# Altium PCB MainBoard.PcbDoc
Units mil, origin at the board's own origin, x right, y up, seen from the top; angles counter-clockwise.
Board outline 4000 x 4000 mil, 2 copper layers (Top Layer, Bottom Layer); 62 components, 26 nets, 130 pads, 17 vias.
Unrouted connection lines stored in the file: 4.
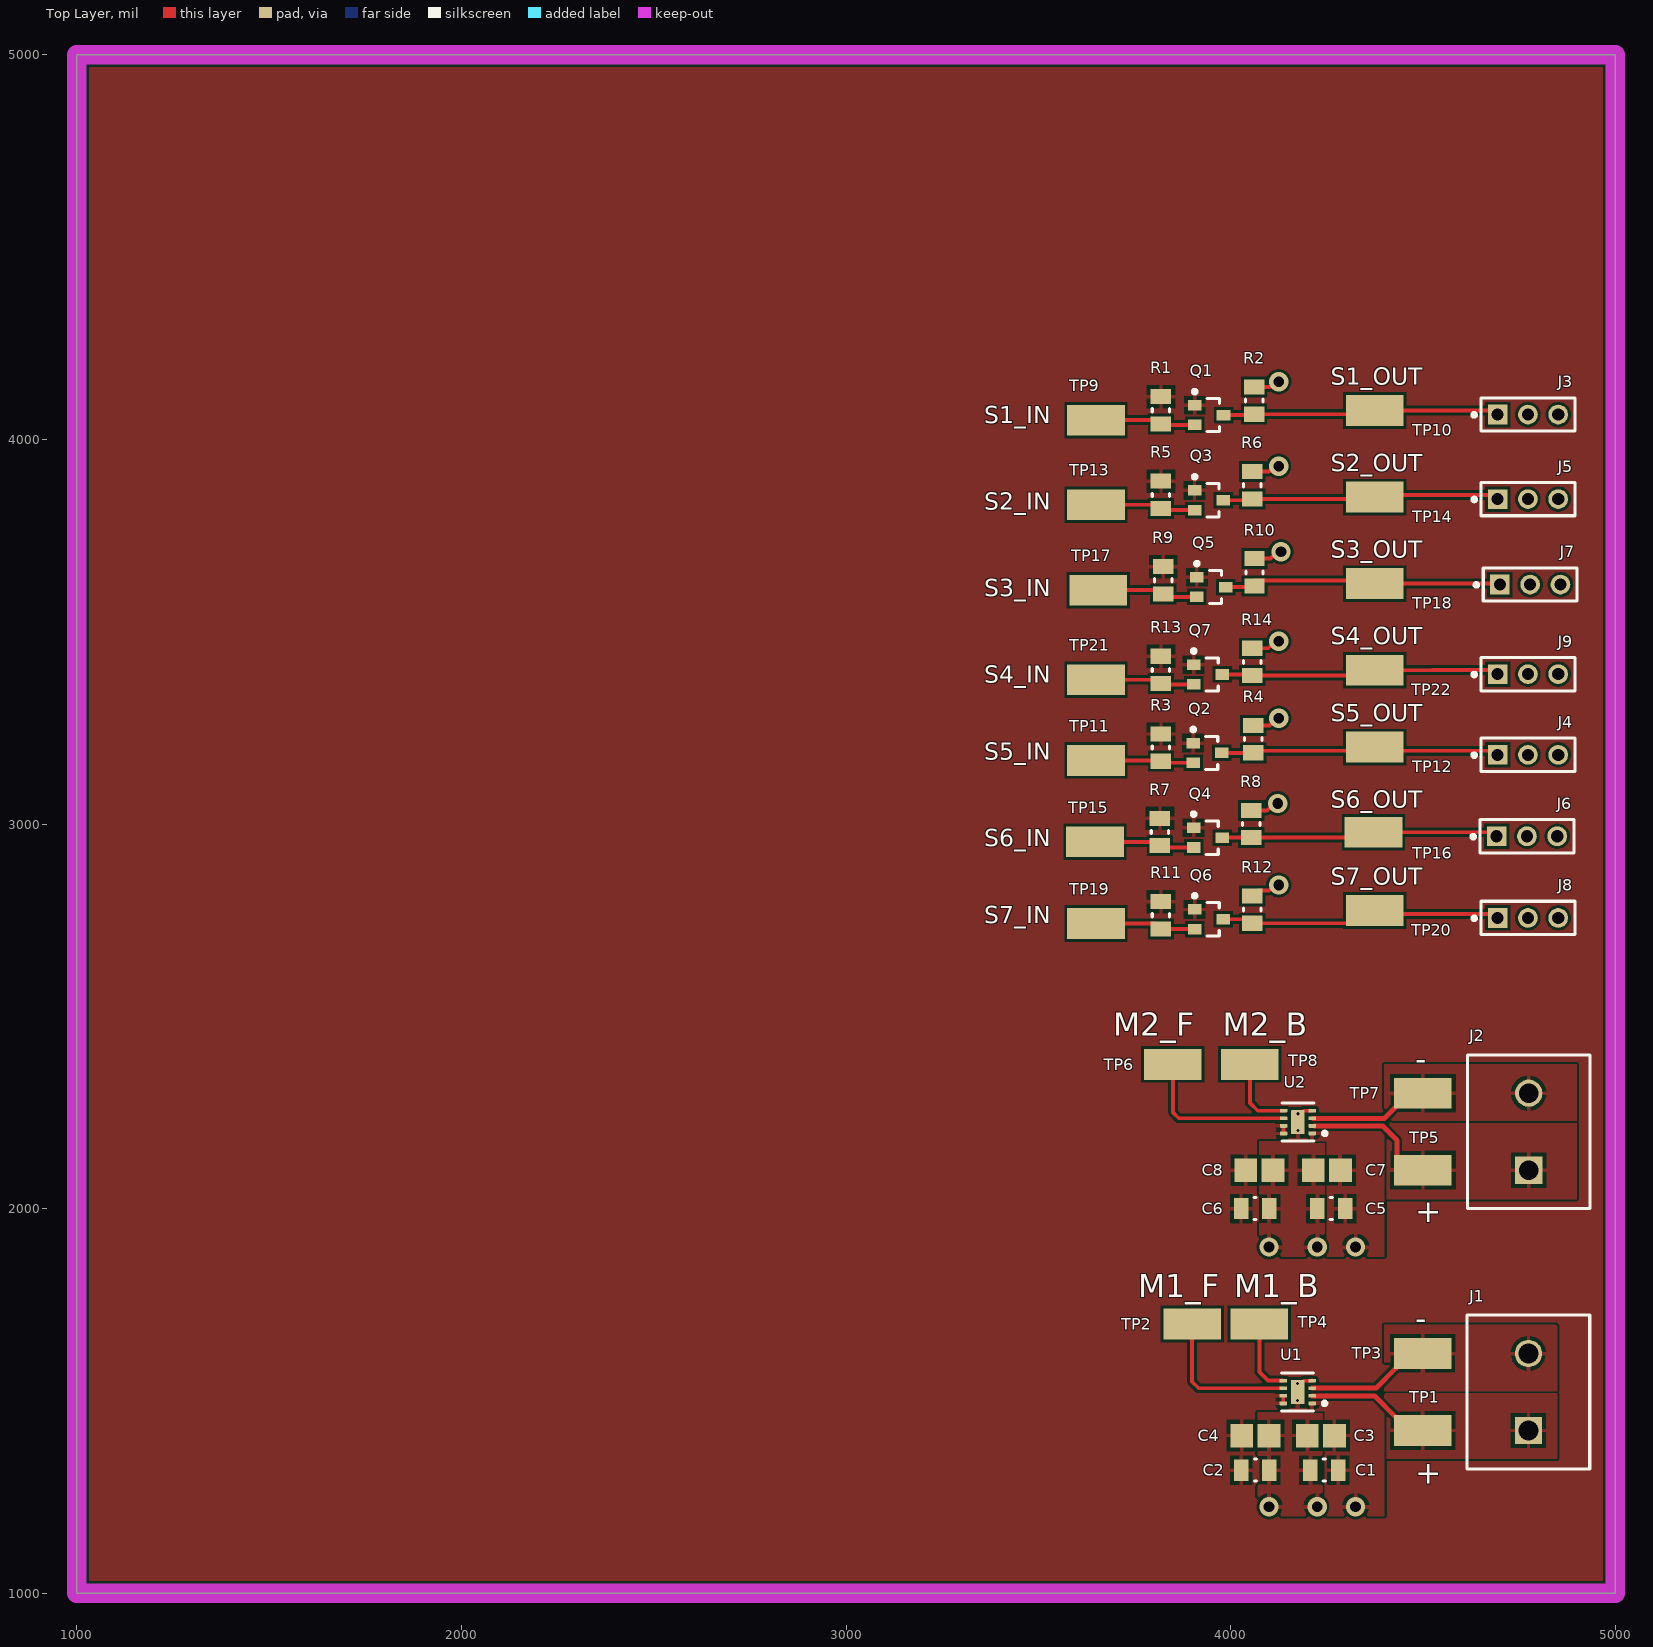
[diagram p0: Top Layer view]
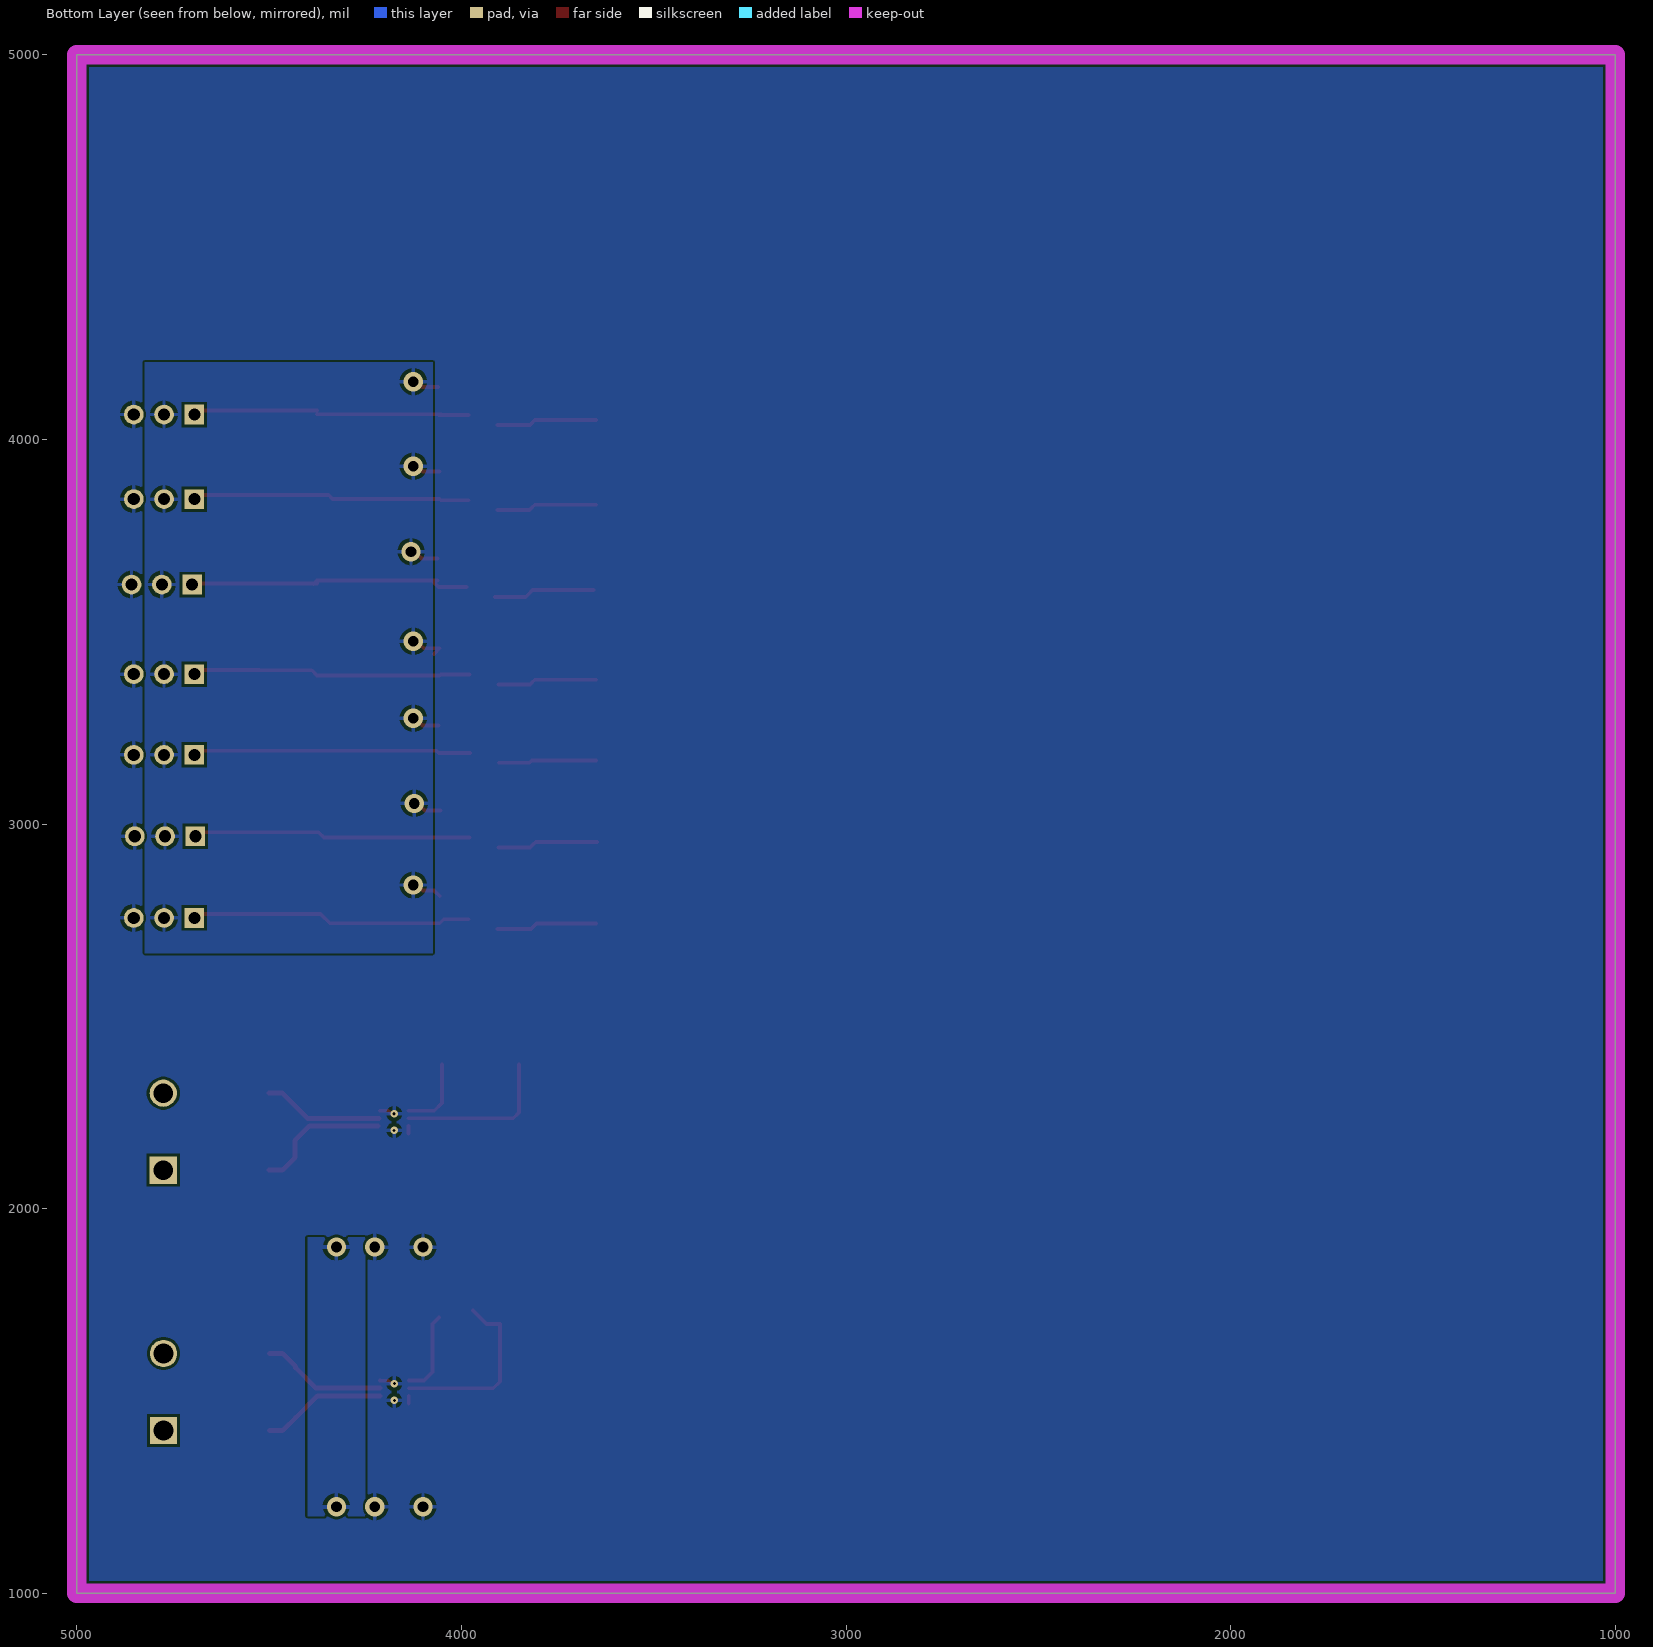
[diagram p1: Bottom Layer view, seen from below]
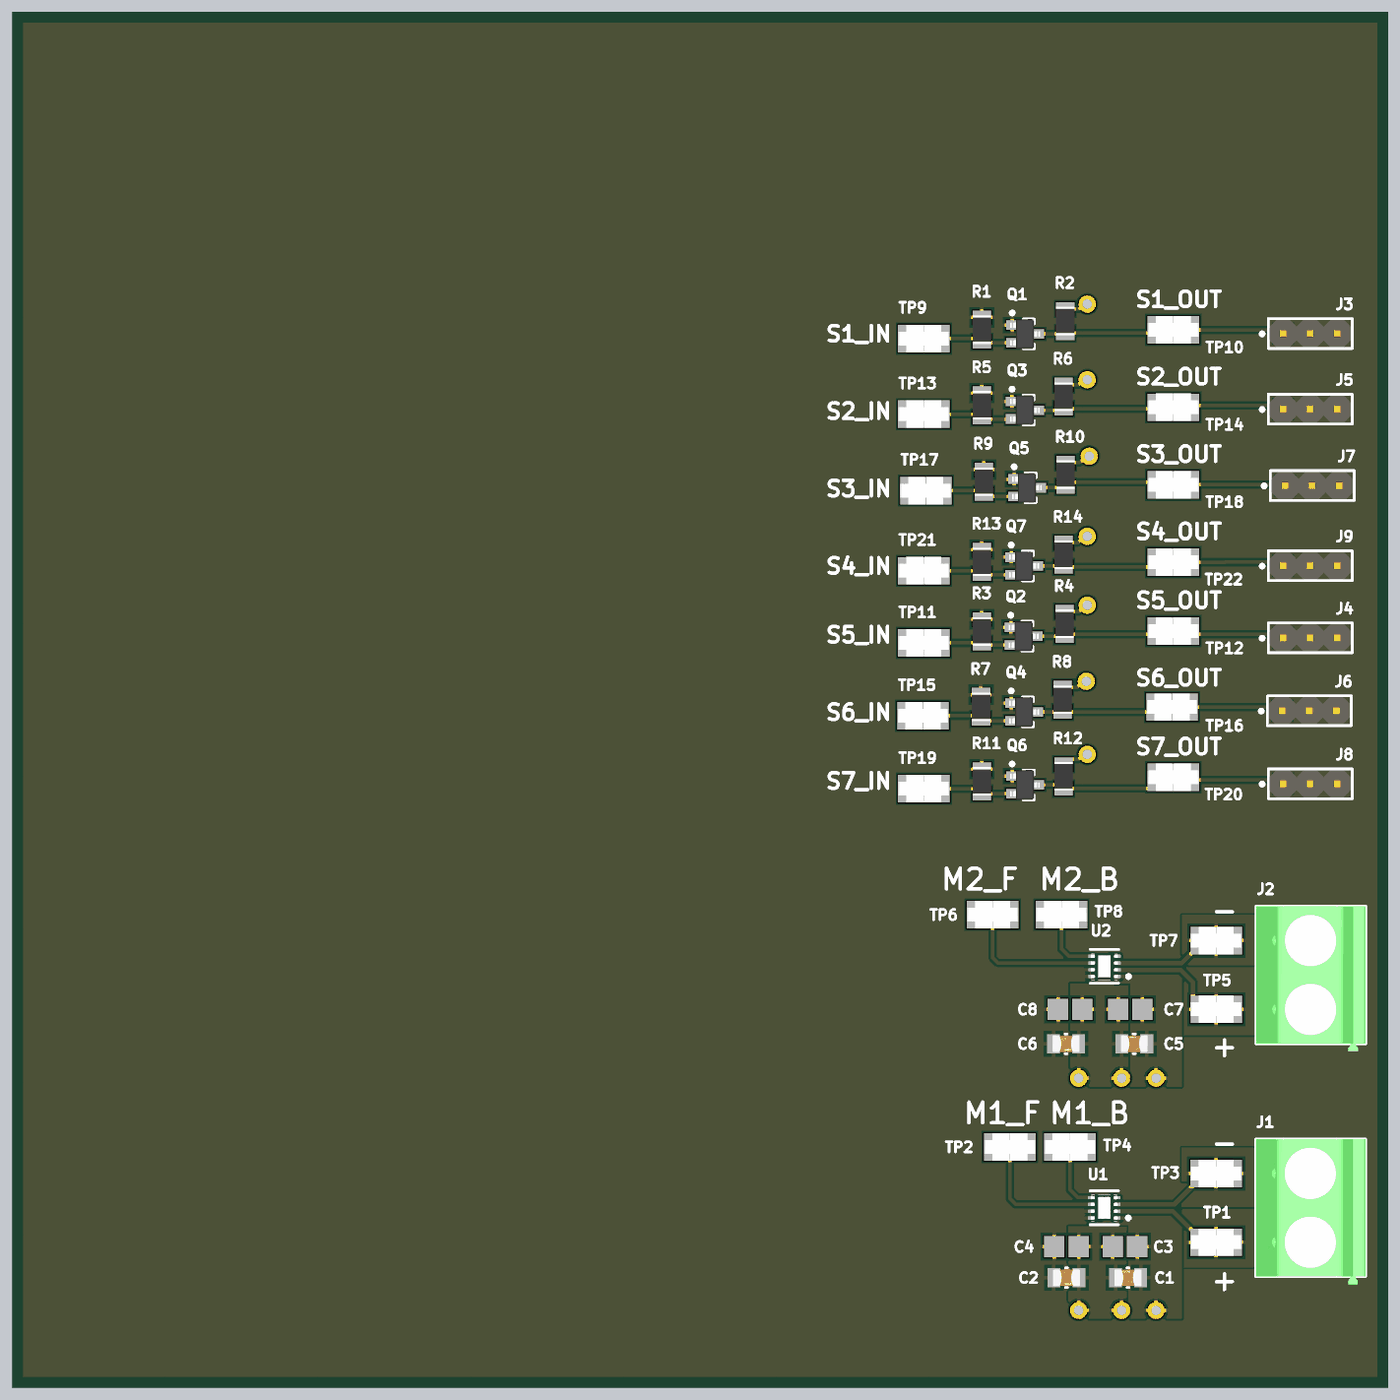
[diagram p2: 3D render of the assembled board from above, using the file's embedded part models]

## Layer stack, top to bottom
Top Solder: solder mask 0.4, Solder Resist, Dk 3.5
Top Layer: signal copper 1.4
Dielectric 1: dielectric 12.6, FR-4, Dk 4.8
Bottom Layer: signal copper 1.4
Bottom Solder: solder mask 0.4, Solder Resist, Dk 3.5

## Board outline
1000,1000 5000,1000 5000,5000 1000,5000

## Design rules (kind name [scope] priority, off if disabled: settings)
Clearance [All] p1: gap=7 ignorepadtopadclearanceinfootprint=TRUE except(5: Arc-Arc Arc-Track Track-Track Fill-Fill Fill-Poly Fill-Region Poly-Poly Poly-Region Region-Region)
PolygonConnect [All] p1: connectstyle=Relief reliefconductorwidth=10 reliefentries=4 polygonreliefangle="90 Angle" airgapwidth=10
RoomDefinition ServoDrivers [InComponentClass('ServoDrivers')] p1: confinementstyle=ConfineIn formatcopy=TRUE lockcomponents=FALSE outline 3250,2639.57 4972.17,2639.57 4972.17,4264.57 3250,4264.57
RoomDefinition MotorDrivers [InComponentClass('MotorDrivers')] p2: confinementstyle=ConfineIn formatcopy=TRUE lockcomponents=FALSE outline 3599.31,998.17 4999.31,998.17 4999.31,2625 3599.31,2625
RoutingVias [All] p1: holewidth=28 width=50 viastyle="Through Hole" minholewidth=28 minwidth=50 maxholewidth=28 maxwidth=50
SolderMaskExpansion [All] p1: expansion=4 istentingtop=FALSE
Width [All] p1: maxlimit=30 minlimit=10 preferedwidth=10
30 further rules are at their usual default settings.

## Classes and differential pairs
component class ServoDrivers: J3 J4 J5 J6 J7 J8 J9 Q1 Q2 Q3 Q4 Q5 Q6 Q7 R1 R2 R3 R4 R5 R6 R7 R8 R9 R10 R11 R12 R13 R14 TP9 TP10 TP11 TP12 TP13 TP14 TP15 TP17 TP18 TP19 TP20 TP21 TP22
component class MotorDrivers: C1 C2 C3 C4 C5 C6 C7 C8 J1 J2 TP1 TP2 TP3 TP4 TP5 TP6 TP7 TP8 U1 U2

## Components (designator, comment, footprint, x,y, rotation, side; value= is the part's Value field where it differs from the comment)
C1 "0.1uF" FP-CC0805-0_85-MFG 4243.58,1320 r180 top value="100 nF"
C2 "0.1uF" FP-CC0805-0_85-MFG 4064.45,1320 r0 top value="100 nF"
C3 "1uF" CAPC2013X145X50ML20T25 4234.57,1410 r0 top
C4 "1uF" CAPC2013X145X50ML20T25 4064.57,1410 r180 top
C5 "0.1uF" FP-CC0805-0_85-MFG 4261.42,2000 r180 top value="100 nF"
C6 "0.1uF" FP-CC0805-0_85-MFG 4063.58,2000 r0 top value="100 nF"
C7 "1uF" CAPC2013X145X50ML20T25 4250,2100 r0 top
C8 "1uF" CAPC2013X145X50ML20T25 4075,2100 r180 top
J1 "1729128" PHOE-1729128-2_V 4774.31,1523.17 r90 top
J2 "1729128" PHOE-1729128-2_V 4775,2200 r90 top
J3 "951103-8622-AR" FP-951103-8622-AR-MFG 4773.03,4064.57 r0 top
J4 "951103-8622-AR" FP-951103-8622-AR-MFG 4773.03,3179.89 r0 top
J5 "951103-8622-AR" FP-951103-8622-AR-MFG 4773.03,3844.74 r0 top
J6 "951103-8622-AR" FP-951103-8622-AR-MFG 4770.41,2968.11 r0 top
J7 "951103-8622-AR" FP-951103-8622-AR-MFG 4778.86,3622.55 r0 top
J8 "951103-8622-AR" FP-951103-8622-AR-MFG 4773.03,2755.84 r0 top
J9 "951103-8622-AR" FP-951103-8622-AR-MFG 4773.03,3389.57 r0 top
Q1 "BSS138W-7-F" DIOD-SOT323-3_V 3944.16,4063.2 r0 top
Q2 "BSS138W-7-F" DIOD-SOT323-3_V 3939.95,3184.74 r0 top
Q3 "BSS138W-7-F" DIOD-SOT323-3_V 3943.7,3841.79 r0 top
Q4 "BSS138W-7-F" DIOD-SOT323-3_V 3941.27,2964.57 r0 top
Q5 "BSS138W-7-F" DIOD-SOT323-3_V 3949.73,3616.05 r0 top
Q6 "BSS138W-7-F" DIOD-SOT323-3_V 3943.9,2752.29 r0 top
Q7 "BSS138W-7-F" DIOD-SOT323-3_V 3941.27,3388.72 r0 top
R1 "10k" RESC2013X60X35NL10T20 3818.9,4075.79 r90 top value=10kR
R2 "10k" RESC2013X60X35NL10T20 4060.97,4100.9 r90 top value=10kR
R3 "10k" RESC2013X60X35NL10T20 3818.9,3198.64 r90 top value=10kR
R4 "10k" RESC2013X60X35NL10T20 4059.16,3220.54 r90 top value=10kR
R5 "10k" RESC2013X60X35NL10T20 3818.9,3855.96 r90 top value=10kR
R6 "10k" RESC2013X60X35NL10T20 4056.3,3880.77 r90 top value=10kR
R7 "10k" RESC2013X60X35NL10T20 3816.27,2979.33 r90 top value=10kR
R8 "10k" RESC2013X60X35NL10T20 4053.68,3000 r90 top value=10kR
R9 "10k" RESC2013X60X35NL10T20 3824.73,3633.77 r90 top value=10kR
R10 "10k" RESC2013X60X35NL10T20 4062.13,3654.43 r90 top value=10kR
R11 "10k" RESC2013X60X35NL10T20 3818.9,2762.73 r90 top value=10kR
R12 "10k" RESC2013X60X35NL10T20 4056.3,2777.29 r90 top value=10kR
R13 "10k" RESC2013X60X35NL10T20 3818.9,3400.79 r90 top value=10kR
R14 "10k" RESC2013X60X35NL10T20 4056.3,3421.46 r90 top value=10kR
TP1 "5019" KSTN-5019_V 4499.31,1423.17 r0 top
TP2 "5019" KSTN-5019_V 3900,1700 r0 top
TP3 "5019" KSTN-5019_V 4499.31,1623.17 r0 top
TP4 "5019" KSTN-5019_V 4075,1700 r0 top
TP5 "5019" KSTN-5019_V 4500,2100 r0 top
TP6 "5019" KSTN-5019_V 3850,2375 r0 top
TP7 "5019" KSTN-5019_V 4500,2300 r0 top
TP8 "5019" KSTN-5019_V 4050,2375 r0 top
TP9 "5019" KSTN-5019_V 3650,4050 r0 top
TP10 "5019" KSTN-5019_V 4375,4075 r0 top
TP11 "5019" KSTN-5019_V 3650,3165.32 r0 top
TP12 "5019" KSTN-5019_V 4375,3200 r0 top
TP13 "5019" KSTN-5019_V 3650,3830.18 r0 top
TP14 "5019" KSTN-5019_V 4375,3850 r0 top
TP15 "5019" KSTN-5019_V 3647.38,2953.54 r0 top
TP16 "5019" KSTN-5019_V 4371.46,2978.54 r0 top
TP17 "5019" KSTN-5019_V 3655.83,3607.98 r0 top
TP18 "5019" KSTN-5019_V 4375,3625 r0 top
TP19 "5019" KSTN-5019_V 3650,2741.27 r0 top
TP20 "5019" KSTN-5019_V 4375,2775 r0 top
TP21 "5019" KSTN-5019_V 3650,3375 r0 top
TP22 "5019" KSTN-5019_V 4375,3400 r0 top
U1 "DRV8837DSGR" FP-DSG0008A-MFG 4174.31,1523.17 r180 top
U2 "DRV8837DSGR" FP-DSG0008A-MFG 4175,2225 r180 top

## Footprints (in the part's own frame and the unit in brackets; to place one, negate y for a bottom-side part, rotate by r counter-clockwise, add the part's x,y. Pads: shape width x height; smd on the part's side, far side on the other; paste and mask are expansions set on the pad)
CAPC2013X145X50ML20T25 [mm] "Chip Capacitor, 2-Leads, Body 2.00x1.25mm, IPC Low Density"
  rect 1.5x1.55 smd: 1(-0.9,0) 2(0.9,0)
  body extent -1.1,-0.72 1.1,0.72, height 1.45
DIOD-SOT323-3_V [mm] "SOT323, 3-Leads, Body 2.2x1.35mm, Pitch 0.65mm"
  rect 0.9x0.7 smd: 1(-0.95,0.65) 2(-0.95,-0.65) 3(0.95,0)
  silkscreen extent -1.07,-1.1 0.67,1.67, body extent -1.1,-1.1 1.1,1.1, height 1.07
FP-951103-8622-AR-MFG [mm]
  rect 1.3x1.3 hole 0.8 paste-1000 mask+0: 1(-2,0)
  round 1.3 hole 0.8 paste-1000 mask+0: 2(0,0) 3(2,0)
  silkscreen extent -3.67,-1.1 3.1,1.1, body extent -3.2,-1.2 3.2,1.2, height 0.25
FP-CC0805-0_85-MFG [mm]
  rect 0.95x1.4 smd paste+0 mask+0: 1(-0.925,0) 2(0.925,0)
  silkscreen extent -0.08,-0.72 0.08,0.72, body extent -1.6,-1.05 1.6,1.05, height 0.25
FP-DSG0008A-MFG [mm]
  rrect40% 0.5x0.25 smd paste+0 mask+0: 1(-0.95,0.75) 2(-0.95,0.25) 3(-0.95,-0.25) 4(-0.95,-0.75) 5(0.95,-0.75) 6(0.95,-0.25) 7(0.95,0.25) 8(0.95,0.75)
  rrect11% 0.9x1.6 smd paste-1000 mask+0: 9(0,0)
  silkscreen extent -1.9,-1.25 1.05,1.25, body extent -1.3,-1.15 1.3,1.15, height 0.25
KSTN-5019_V [mm] "Test Point, 1-Leads, Body 3.81x2.03mm"
  rect 3.8x2.03 smd: 1(0,0)
  body extent -1.9,-1.01 1.9,1.02, height 2.29
PHOE-1729128-2_V [mm] "Receptacle, 2-Leads, Body 8.1x10.16mm, Pitch 5.08mm"
  rect 1.8x1.8 hole 1.3: 1(-2.54,0)
  round 1.8 hole 1.3: 2(2.54,0)
  silkscreen extent -5.08,-4.05 5.08,4.05, body extent -5.65,-4.05 5.08,4.05, height 10.01
RESC2013X60X35NL10T20 [mm] "Chip Resistor, 2-Leads, Body 2.1x1.35mm, IPC Medium Density"
  rect 1x1.35 smd: 1(-0.9,0) 2(0.9,0)
  silkscreen extent -0.1,-0.58 0.1,0.58, body extent -1.05,-0.68 1.05,0.67, height 0.6

## Part data
C1 C2 C5 C6: library part CMP-1036-04410-2, "CAP CER 0.1UF 25V X7R 0805", Capacitance="100 nF", Case Code (Imperial)=0805, Case Code (Metric)=2012, Dielectric=X7R, Insulation Resistance=100GR, Manufacturer=Yageo, Manufacturer Part Number=CC0805KRX7R8BB104, Max Operating Temperature=125°C, Min Operating Temperature=-55°C, Package=CC0805-0.85, Package Quantity=4000, Resistor Type=Ceramic, Supplier Part Number 1=311-1141-1-ND, Temperature="-30°C to +85°C", Temperature Range High=+85°C, Temperature Range Low=-30°C, Tolerance=0.1, Voltage Rating="25 V", Voltage Rating (DC)=25V, Automotive=No, Case/Package=0805, Category=Cap, ComponentLink1Description=https://datasheet.ciiva.com/8034/70765-8034031.pdf?src-supplier=Element14, ComponentLink1URL=https://datasheet.ciiva.com/8034/70765-8034031.pdf?src-supplier=Element14, ComponentLink2Description=Datasheet, ComponentLink2URL=http://www.yageo.com/documents/recent/UPY-GPHC_Y5V_6.3V-to-50V_8.pdf, ComponentLink3Description=https://datasheet.ciiva.com/28450/1489800-28450789.pdf?src-supplier=Element14, ComponentLink3URL=https://datasheet.ciiva.com/28450/1489800-28450789.pdf?src-supplier=Element14, ComponentLink4Description=https://datasheet.ciiva.com/46430/1850775-46430166.pdf?src-supplier=Element14, ComponentLink4URL=https://datasheet.ciiva.com/46430/1850775-46430166.pdf?src-supplier=Element14, ComponentLink5Description=https://datasheet.ciiva.com/145/mlccorderingcode-145008.pdf?src-supplier=Digi-Key, ComponentLink5URL=https://datasheet.ciiva.com/145/mlccorderingcode-145008.pdf?src-supplier=Digi-Key, ComponentLink6Description=https://datasheet.ciiva.com/145/mlccorderingcode-145007.pdf?src-supplier=Digi-Key, ComponentLink6URL=https://datasheet.ciiva.com/145/mlccorderingcode-145007.pdf?src-supplier=Digi-Key, ComponentLink7Description=https://datasheet.ciiva.com/145/mlccorderingcode-145009.pdf?src-supplier=Digi-Key, ComponentLink7URL=https://datasheet.ciiva.com/145/mlccorderingcode-145009.pdf?src-supplier=Digi-Key, ComponentLink8Description=https://datasheet.ciiva.com/8034/1784427-8034030.pdf?src-supplier=Element14, ComponentLink8URL=https://datasheet.ciiva.com/8034/1784427-8034030.pdf?src-supplier=Element14, Depth=1.25mm, Device Class L1="Passive Components", Device Class L2=Capacitors, Device Class L3="Ceramic Capacitors", Digikey Description="CAP CER 0.1UF 25V X7R 0805", Footprint Url=http://www.yageo.com/exep/pages/download/literatures/UPY-C_GEN_24.pdf, Halogen Free="Halogen Free", Height=0.95mm, Ipc Land Pattern Name=CAPC200125X85, Lead Free=Yes, Length=2mm, Material=Ceramic, Mount="Surface Mount", Mouser Description="Multilayer Ceramic Capacitors MLCC - SMD/SMT 100nF 25V X7R 10%", Number of Pins=2, Octopart=https://octopart.com/cc0805krx7r8bb104-yageo-39467766, Packaging="Tape and Reel", Pricing 1="1=0.11000, 10=0.07700, 50=0.04380, 100=0.03620, 500=0.02542, 1000=0.02104 (USD)", Radiation Hardening=No, Reach SVHC Compliant=Yes, RoHS=TRUE, RoHS Compliant=Yes, Series=CC, Stock 1=1013369, Supplier 1=Digi-Key, Temperature Characteristic=X7R, Termination=SMD/SMT, Thickness=0.033inch, Width=1.25mm
C3 C4 C7 C8: library part CMP-1036-04757-2, Case Code (Imperial)=0805, Case Code (Metric)=2012, Dielectric=Y5V, Manufacturer=Yageo, Manufacturer Part Number=CC0805ZRY5V8BB105, Max Operating Temperature=85°C, Min Operating Temperature=-30°C, Package Quantity=1, Resistor Type=Ceramic, Supplier Part Number 1=311-1358-1-ND, Tolerance=80%, Voltage Rating=25V, Capacitance=1uF, Case/Package=0805, Category="Ceramic Capacitors", ComponentLink1Description=https://datasheet.ciiva.com/144/mlccorderingcode-144703.pdf?src-supplier=Digi-Key, ComponentLink1URL=https://datasheet.ciiva.com/144/mlccorderingcode-144703.pdf?src-supplier=Digi-Key, ComponentLink2Description=https://datasheet.ciiva.com/26863/getdatasheetpartid-419810-26863011.pdf?src-supplier=Verical, ComponentLink2URL=https://datasheet.ciiva.com/26863/getdatasheetpartid-419810-26863011.pdf?src-supplier=Verical, ComponentLink3Description=https://datasheet.ciiva.com/28450/1132289-28450860.pdf?src-supplier=Element14, ComponentLink3URL=https://datasheet.ciiva.com/28450/1132289-28450860.pdf?src-supplier=Element14, ComponentLink4Description=https://datasheet.ciiva.com/144/mlccorderingcode-144704.pdf?src-supplier=Digi-Key, ComponentLink4URL=https://datasheet.ciiva.com/144/mlccorderingcode-144704.pdf?src-supplier=Digi-Key, ComponentLink5Description=https://datasheet.ciiva.com/144/mlccorderingcode-144705.pdf?src-supplier=Digi-Key, ComponentLink5URL=https://datasheet.ciiva.com/144/mlccorderingcode-144705.pdf?src-supplier=Digi-Key, ComponentLink6Description=https://datasheet.ciiva.com/13208/upy-gp-np0-16v-to-50v-8-13208251.pdf?src-supplier=Mouser, ComponentLink6URL=https://datasheet.ciiva.com/13208/upy-gp-np0-16v-to-50v-8-13208251.pdf?src-supplier=Mouser, Depth=1.25mm, Halogen Free="Halogen Free", Height=0.85mm, Lead Free="Lead Free", Length=2mm, Mount="Surface Mount", Packaging="Tape and Reel", Part Number=CC0805ZRY5V8BB105, Pricing 1="1=0.13000, 10=0.09000, 50=0.05100, 100=0.04230, 500=0.02966, 1000=0.02456 (USD)", Radiation Hardening=No, Reach SVHC Compliant=Yes, RoHS=Yes, RoHS Compliant=Yes, Series=CC, Stock 1=286163, Supplier 1=Digi-Key, Termination=SMD/SMT, Thickness=0.033inch, Voltage Rating (DC)=25V, Weight=0.000194oz, Width=1.25mm
J1 J2: library part CMP-2000-05815-1, "PCB Terminal Block, 13.5 A, 400 V, 2-Pin THD, RoHS, Bulk", Color=Green, Current=10A, Current Rating=13500mA, Flammability Rating="UL94 V-0", Manufacturer="Phoenix Contact", Max Current Rating=13.5A, Max Operating Temperature=100°C, Max Supply Voltage=400V, Min Operating Temperature=-20°C, Package Description="2-Pin Through Hole Device, Body 8.1 x 10.16 mm, Pitch 5.08 mm", Package Quantity=50, Package Reference=1729128-2, Package Version=03/2015, Supplier Part Number 1=277-1247-ND, Test Voltage=4kV, Voltage=300V, Approvals=UL,CSA, Category="Terminal Blocks", ComponentLink1Description=https://datasheet.ciiva.com/16046/1729128-16046181.pdf?src-supplier=Onlinecomponents.com, ComponentLink1URL=https://datasheet.ciiva.com/16046/1729128-16046181.pdf?src-supplier=Onlinecomponents.com, ComponentLink2Description=https://datasheet.ciiva.com/15169/getdatasheetpartid-199310-15169845.pdf?src-supplier=Verical, ComponentLink2URL=https://datasheet.ciiva.com/15169/getdatasheetpartid-199310-15169845.pdf?src-supplier=Verical, ComponentLink3Description=https://datasheet.ciiva.com/823/1729128-823779.pdf?src-supplier=Digi-Key, ComponentLink3URL=https://datasheet.ciiva.com/823/1729128-823779.pdf?src-supplier=Digi-Key, ComponentLink4Description=https://datasheet.ciiva.com/14607/70054405-14607157.pdf?src-supplier=Allied+Electronics, ComponentLink4URL=https://datasheet.ciiva.com/14607/70054405-14607157.pdf?src-supplier=Allied+Electronics, ComponentLink5Description=https://datasheet.ciiva.com/29218/743664-da-01-en-printklemmenblock-mkdsn-1-5-2-5-08-29218154.pdf?src-supplier=Conrad, ComponentLink5URL=https://datasheet.ciiva.com/29218/743664-da-01-en-printklemmenblock-mkdsn-1-5-2-5-08-29218154.pdf?src-supplier=Conrad, Connector Type=Screw, Contact Material=Tin, Datasheet URL=https://datasheet.ciiva.com/16046/1729128-16046181.pdf, Datasheet Version=12/2013, Depth=8.1mm, Height=13.5mm, Housing Color=Green, Housing Material=Polyamide, Insulation Material=Nylon, Lead Free="Lead Free", Length=8.1mm, Manufacturer Part Number=1729128, Manufacturer URL=http://www.phoenixcontact.com/, Mounting Technology=ThroughHole, No. of Positions=2, No. of Rows=1, Number of Circuits=2, Number of Contacts=2, Number of Levels=1, Number of Poles=2, Number of Positions=2, Number of Positions Per Level=2, Number of Rows=1, Orientation=Horizontal, Package URL=https://www.phoenixcontact.com/online/portal/pi/pxc/product_detail_page/!ut/p/b1/3VdJjqNKFDxLH8AFycySyWY2ozFsEPOMMQaDOX1XedGL_1Vdm5YXJleknhSKeBkvI6EA8ncAo3AYoDhBQGco6KN7VURTdemj9us_IEKEZo_YHiPAEWEFmDGOHMORkqKYCORBZxgL7ZoaZYcbFFUZ3fqxSY6GOuxydWUuHqz1ynmMFygu583Bob0Ewr6Sd_l-5m-kAueHiB0jpRwZwe58wwtkpxtMYd_LmGcDRU02dRNEyWt6Y2ti5pSyJ_reIkzIulrqApdnbT11V5jnCKbYNCvhEM1MCpPByat_X379-iThf08CI5GfOPqfBeS3BRoBOdD55AKVv0iLwCMq-2BrzXWSGRH7pUGD9uwXQjiph3xL0DKQwdGa0JImiIOmBNOestqgwTHSSs2oOep-78apyXQBvNi8ZLaFjvjWvcaUEBu0MC6Wbe-d6mB0FAebo2lUWinqYaZs5DAYzV0RP9yitUjnGJ0iI9xhZkT42OCQNUJJhkgWINNQLP2JFP6OpMg3JCVg70jqHT0lvKOnhHf0lPuOnnLf0VPuWx6_dxwUIvwk5WMkT0kLL1mh61l2yZVSzG3pYV_bqo-mj6uMKwKwdnnW8Jh5RTOJzMOA5c-eJDaZQw4mTMPH02PvS_ZAqNVjVTo2WyYLkwH_KU1mmmG5kjRhDqPXLwwVHvVOjCM60-fpXvTDfMGW1PVFVS1r4e4yVDk4ZdNbkUHvqPqQSeian4UD39fNKmachqdJ1NJbyk8rXT9mXTvPk3oE5meulKGgiruPJek-4I9hTT6G8ZLOyRSm2RRVbThERQad5OS28hdt4YW4vG0stgYYzsWsK4_7y6DZMjJSCqri1kyiZR5vD7pwIrNR7QwPHTcLTI5qT7eRlpHrdGiupYlqQDJ7zy_CND8fWWBoLRXxk1RVcXiBQwbTD4Xi7KL-FuO94t9xaqweXzH, Packaging=Bulk, Packing=Bulk, PartNumber=1729128, Pins=2, Pitch=5.08mm, Pricing 1="1=1.32000, 10=1.16200, 50=1.11100, 100=1.08070, 250=1.01000, 500=0.92920, 1000=0.85850, 2500=0.81810, 5000=0.76760 (USD)", Radiation Hardening=No, Reach SVHC Compliant=Yes, RoHS=TRUE, RoHS Compliant=Yes, Series=MKDSN, Stock 1=23221, Supplier 1=Digi-Key, Termination=Solder, Voltage Rating=400V, Weight=0.069842oz, Width=13.5mm, Wire Gauge (Max)=26AWG, Wire Gauge (Min)=14AWG, Wire/Cable Gauge=26AWG
J3 J4 J5 J6 J7 J8 J9: library part CMP-05379-000003-1, "CONN HEADER VERT 3POS 2MM", Color=Black, Contact Resistance=20mR, Current Rating=2A, Flammability Rating="UL94 V-0", Manufacturer=3M, Max Current Rating=1A, Max Operating Temperature=125°C, Min Operating Temperature=-55°C, Package Quantity=3000, Supplier Part Number 1=3M156413-03-ND, Temperature="-55°C to +125°C", Temperature Range High=+125°C, Voltage Rating=1kV, Automotive=No, Category=Conn, ComponentLink1Description=https://datasheet.ciiva.com/730/ts2156-730432.pdf?src-supplier=Digi-Key, ComponentLink1URL=https://datasheet.ciiva.com/730/ts2156-730432.pdf?src-supplier=Digi-Key, ComponentLink2Description=Datasheet, ComponentLink2URL=http://multimedia.3m.com/mws/media/1400506O/3m-pin-strip-header-951-series-78-5100-2653-3.pdf, ComponentLink3Description=https://datasheet.ciiva.com/14622/70237750-14622743.pdf?src-supplier=Allied+Electronics, ComponentLink3URL=https://datasheet.ciiva.com/14622/70237750-14622743.pdf?src-supplier=Allied+Electronics, ComponentLink4Description=https://datasheet.ciiva.com/7997/ts2156-7997244.pdf?src-supplier=Element14, ComponentLink4URL=https://datasheet.ciiva.com/7997/ts2156-7997244.pdf?src-supplier=Element14, Conn Gender=Male, Conn Orientation=Straight, Connector Type=Header, Contact Finish - Mating=GOLD, Contact Gender=Male, Contact Material=Gold,Nickel, Contact Mating Length=0.173inch, Contact Plating=Gold, Contact Post Length=2.8mm, Contact Shape=Square, Contact Type="Male Pin", Depth=2mm, Device Class L1=Connectors, Device Class L2="Headers and Wire Housings", Device Class L3=unset, Digikey Description="CONN HEADER VERT 3POS 2MM", Fastening Type=Pull, Gender=Male, Height=6.3mm, Housing Color=Black, Housing Material=Thermoplastic, Insulation Color=Black, Insulation Material=Thermoplastic, Lead Free=Yes, Length=6mm, Manufacturer Part Number=951103-8622-AR, Mounting Technology="Through Hole", Mouser Description="Header; PinStrip; CopperAlloy; HighTempThermoplastic; 3Cnts; 1A; RtAngle; 951Series", Number of Contacts=3, Number of Positions=3, Number of Rows=1, Octopart=https://octopart.com/951103-8622-ar-3m-14400669, Orientation=Straight, Package=951103-8622-AR, Packaging=Bulk, Pitch=2mm, Pricing 1="1=0.30000, 10=0.28800, 25=0.24720, 50=0.21020, 100=0.20190, 250=0.18128, 500=0.17304 (USD)", RoHS=TRUE, RoHS Compliant=Yes, Series=951, Stock 1=1012, Supplier 1=Digi-Key, Temperature Range Low=-55°C, Termination=Solder
Q1 Q2 Q3 Q4 Q5 Q6 Q7: library part CMP-2000-05968-1, "N-Channel Enhancement Mode Mosfet, 50 V, 200 mA, -55 to 150 degC, 6-Pin SOT-323, RoHS, Tape and Reel", Case/Package=SOT-323, Continuous Drain Current (ID)=200mA, Drain to Source Breakdown Voltage=75V, Drain to Source Resistance=1.4R, Drain to Source Voltage (Vdss)=50V, Drain-source On Resistance-Max=3.5R, Gate to Source Voltage (Vgs)=20V, Input Capacitance=50pF, Manufacturer=DiodesIncorporated, Max Operating Temperature=150°C, Max Power Dissipation=200mW, Maximum Operating Temperature=+150C, Min Operating Temperature=-55°C, Minimum Operating Temperature=-55C, Package / Case=SOT-323-3, Package Description="3-Pin Small Outline Transistor, Body 2 x 1.25 mm, Pitch 0.65 mm", Package Quantity=1, Package Reference=SOT323, Rds On - Drain-Source Resistance=1.4Ohms, Supplier Part Number 1=BSS138W-FDICT-ND, Threshold Voltage=1.2V, Brand=DiodesIncorporated, Category=MOSFETs, Channel Mode=Enhancement, Configuration=Single, Contact Plating=Tin,Matte, Current Rating=200mA, Datasheet URL=http://www.diodes.com/_files/datasheets/ds30206.pdf, Datasheet Version="Rev. 11-2, 09/2013", Dual Supply Voltage=50V, Element Configuration=Single, Factory Pack Quantity=3000, Forward Transconductance - Min=0.1S, Height=1mm, Id - Continuous Drain Current=200mA, Lead Free="Lead Free", Length=2.2mm, Manufacturer Part Number=BSS138W-7-F, Manufacturer URL=http://www.diodes.com/, Mounting Style=SMD/SMT, Mounting Technology=SurfaceMount, Nominal Vgs=1.2V, Number of Channels=1Channel, Number of Elements=1, On-State Resistance=3.5R, Packaging=Reel, Pd - Power Dissipation=200mW, Pins=3, Polarity=N-CHANNEL, Power Dissipation=200mW, Pricing 1="1=0.31000, 10=0.25600, 100=0.13590, 500=0.08938, 1000=0.06078 (USD)", Product=MOSFETSmallSignal, Product Category=MOSFET, Rds On Max=3.5R, Reach SVHC Compliant=Yes, RoHS=True, RoHS Compliant=Yes, Series=BSS138, Stock 1=346188, Supplier 1=Digi-Key, Technology=Si, Termination=SMD/SMT, Transistor Polarity=N-Channel, Transistor Type=1N-Channel, Turn-Off Delay Time=20ns, Turn-On Delay Time=20ns, Type=EnhancementModeFieldEffectTransistor, Typical Turn-Off Delay Time=20ns, Typical Turn-On Delay Time=20ns, Unit Weight=0.000212oz, Vds - Drain-Source Breakdown Voltage=75V, Vgs - Gate-Source Voltage=20V, Voltage=50V, Voltage Rating (DC)=50V, Weight=0.000212oz, Width=1.35mm
R1 R2 R3 R4 R5 R6 R7 R8 R9 R10 R11 R12 R13 R14: library part CMP-1659-00013-4, "Chip Resistor, 10 KOhm, +/- 1%, 0.125 W, -55 to 155 degC, 0805 (2012 Metric), RoHS, Tape and Reel", Case Code (Imperial)=0805, Case Code (Metric)=2012, Manufacturer=Yageo, Manufacturer Part Number=RC0805FR-0710KL, Max Operating Temperature="155 degC", Max Power Dissipation=125mW, Min Operating Temperature="-55 degC", Package Quantity=5000, Resistance Tolerance=1%, Resistor Type="Thick Film", Supplier Part Number 1=311-10.0KCRCT-ND, Temperature Coefficient=100ppm/°C, Voltage Rating="150 V", Case/Package=0805, Category="Chip SMD Resistors", ComponentLink1Description="Manufacturer URL", ComponentLink1URL=http://www.yageo.com/, ComponentLink2Description=Datasheet, ComponentLink2URL=http://www.yageo.com/documents/recent/PYu-RC_Group_51_RoHS_L_04.pdf, Construction=Rectangular, DatasheetVersion="Rev. 4, 02/2016", Depth=1.25mm, Features="Moisture Resistant", Height="0.5 mm", Lead Free="Lead Free", Length="2 mm", Military Standard=Not, Mount="Surface Mount", Mounting Technology="Surface Mount", Number of Terminations=2, PackageDescription="2-Pin Surface Mounted Device, Body 2 x 1.25 mm", PackageReference=0805, Packaging="Tape and Reel", Pins=2, Power Rating=125mW, Pricing 1="1=0.10000, 10=0.03300, 100=0.01340, 1000=0.00602, 2500=0.00523 (USD)", REACH SVHC="No SVHC", RoHS=Yes, RoHS Compliant=Yes, RoHSCompliant=true, Series=RC, Stock 1=11227289, Supplier 1=Digi-Key, Technology="THICK FILM", Termination=SMD/SMT, Tolerance=1%, Width=0.049inch
TP1 TP2 TP3 TP4 TP5 TP6 TP7 TP8 TP9 TP10 TP11 TP12 TP13 TP14 TP15 TP16 TP17 TP18 TP19 TP20 TP21 TP22: library part CMP-1672-00008-1, "Test Point, 1 Position SMD, RoHS, Tape and Reel", Manufacturer="Keystone Electronics", Package Quantity=1000, Supplier Part Number 1=36-5019CT-ND, Body Material=Bronze, Category=Connectors, ComponentLink1Description="Manufacturer URL", ComponentLink1URL=http://www.keyelco.com/, ComponentLink2Description=Datasheet, ComponentLink2URL=http://www.keyelco.com/product-pdf.cfm?p=1357, ComponentLink3Description=https://datasheet.ciiva.com/16885/70182998-16885945.pdf?src-supplier=Allied+Electronics, ComponentLink3URL=https://datasheet.ciiva.com/16885/70182998-16885945.pdf?src-supplier=Allied+Electronics, ComponentLink4Description=https://datasheet.ciiva.com/14848/m60-2p61-14848437.pdf?src-supplier=Digi-Key, ComponentLink4URL=https://datasheet.ciiva.com/14848/m60-2p61-14848437.pdf?src-supplier=Digi-Key, ComponentLink5Description=https://datasheet.ciiva.com/14848/m60-2p61-14848438.pdf?src-supplier=Digi-Key, ComponentLink5URL=https://datasheet.ciiva.com/14848/m60-2p61-14848438.pdf?src-supplier=Digi-Key, ComponentLink6Description=https://datasheet.ciiva.com/14848/m60-2p61-14848439.pdf?src-supplier=Digi-Key, ComponentLink6URL=https://datasheet.ciiva.com/14848/m60-2p61-14848439.pdf?src-supplier=Digi-Key, ComponentLink7Description=https://datasheet.ciiva.com/16318/m60-2p61-16318395.pdf?src-supplier=Future+Electronics, ComponentLink7URL=https://datasheet.ciiva.com/16318/m60-2p61-16318395.pdf?src-supplier=Future+Electronics, Contact Material=Bronze, Contact Plating=Silver, DatasheetVersion=03/2014, Height=0.09inch, Lead Free="Lead Free", Manufacturer Part Number=5019, Material=Bronze, Mount="Surface Mount", Mounting Technology="Surface Mount", Number of Pins=1, PackageDescription="1-Pin Surface Mount Device, Body 3.81 x 2.03 mm", PackageReference=5019, Packaging="Tape and Reel", Pins=1, Plating=Silver, Pricing 1="1=0.34000, 25=0.27360, 100=0.22340, 250=0.20064, 500=0.19152 (USD)", Reach SVHC Compliant=Yes, RoHS=Yes, RoHS Compliant=Yes, RoHSCompliant=True, Series=5019, Stock 1=1009631, Supplier 1=Digi-Key, Termination=SMD/SMT
U1 U2: library part CMP-04915-000004-1, "IC MOTOR DRIVER PAR 8WSON", Ambient Temperature Range High=+85°C, Ambient Temperature Range Low=-40°C, Manufacturer="Texas Instruments", Max Junction Temp=+150°C, Max Operating Temperature=85°C, Max Output Current=1.8A, Max Supply Voltage=7V, Min Supply Voltage=1.8V, Nominal Supply Current=300-700uA, Output Voltage=0-11V, Package=DSG0008A, Package Quantity=3000, Supplier Part Number 1=296-34806-1-ND, Supply Current=300uA, Switching Frequency=0-250kHz, Temperature="-40°C to +85°C", Automotive=No, Category=IC, ComponentLink1Description=https://datasheet.ciiva.com/15109/getdatasheetpartid-543738-15109646.pdf?src-supplier=Verical, ComponentLink1URL=https://datasheet.ciiva.com/15109/getdatasheetpartid-543738-15109646.pdf?src-supplier=Verical, ComponentLink2Description=Datasheet, ComponentLink2URL=http://www.ti.com/lit/ds/symlink/drv8837.pdf, ComponentLink3Description=https://datasheet.ciiva.com/6602/drv8837-6602821.pdf?src-supplier=Digi-Key, ComponentLink3URL=https://datasheet.ciiva.com/6602/drv8837-6602821.pdf?src-supplier=Digi-Key, Device Class L1="Integrated Circuits (ICs)", Device Class L2="Power Management ICs", Device Class L3="Motor Drivers", Digikey Description="IC MOTOR DRIVER PAR 8WSON", Fault Protection="Over Temperature,Short Circuit", Height=0.8mm, Interface=PWM, Lead Free=Yes, Manufacturer Part Number=DRV8837DSGR, Min Operating Temperature=-40°C, Motor Type=Brushed, Mount="Surface Mount", Mouser Description="Motor / Motion / Ignition Controllers & Drivers 1.8A Low Vltg Brush DC Motor Driver", Number Of Outputs=2, Number of Pins=8, Octopart=https://octopart.com/drv8837dsgr-texas+instruments-23786726, Output Current=1.8A, Packaging="Tape and Reel", Pricing 1="1=1.21000, 10=1.08500, 25=1.03000, 100=0.84600, 250=0.79080, 500=0.69886, 1000=0.55173 (USD)", Radiation Hardening=No, Reach SVHC Compliant=Yes, RoHS=TRUE, RoHS Compliant=Yes, Series=-, Standoff Height=0mm, Stock 1=52410, Supplier 1=Digi-Key, Technology=NMOS, Temperature Range High=+85°C, Temperature Range Low=-40°C, Type="Integrated Circuit (IC)"

## Via types
v1: diameter 50, hole 28, Top Layer to Bottom Layer, 13 vias
v2: diameter 19.68, hole 7.87, Top Layer to Bottom Layer, 4 vias

## Nets (pads, with @x,y where several pads share a name; then routed paths per layer and width w, separated by ;. In a path a pad name is that pad's centre, name@x,y a point inside that pad or via, vN(x,y) a via of type N, cw(c..) or ccw(c..) an arc to the next point about the centre after c; other vN are vias at no path point)
3.3V: C2.1 C4.2 C6.1 C8.2 Q1.1 Q2.1 Q3.1 Q4.1 Q5.1 Q6.1 Q7.1 R1.2 R3.2 R5.2 R7.2 R9.2 R11.2 R13.2 U1.7 U1.8 U2.7 U2.8 | length 39.4
  Top Layer w10: U1.8 U1.7 ; U2.8 U2.7
5V: J3.2 J4.2 J5.2 J6.2 J7.2 J8.2 J9.2 R2.2 R4.2 R6.2 R8.2 R10.2 R12.2 R14.2 | length 547.8
  Top Layer w10: R8.2 4095.25,3035.43 4113.36,3053.54 v1(4122.38,3053.54) ; R12.2 4070.98,2827.41 4100.32,2827.41 4114.18,2841.27 v1(4125,2841.27) ; R6.2 4100.2,3916.2 4114.18,3930.18 v1(4125,3930.18) ; R4.2 4100.66,3255.97 4119.69,3275 v1(4125,3275) ; R2.2 4100.66,4136.34 4114.33,4150 v1(4125,4150) ; R10.2 4103.71,3689.87 4121.82,3707.98 v1(4130.83,3707.98) ; R14.2@4070.98,3442.2 R14.2 4097.87,3456.89 4115.99,3475 v1(4125,3475)
12V: C1.1 C3.2 C5.1 C7.2 U1.1 U2.1
  other v1: 4325,1225 4325,1900
GND: C1.2 C2.2 C3.1 C4.1 C5.2 C6.2 C7.1 C8.1 J3.3 J4.3 J5.3 J6.3 J7.3 J8.3 J9.3 U1.4 U1.9 U2.4 U2.9 | length 81.3
  Top Layer w10: v2(4174.31,1544.82) 4182.18,1544.82 4189.98,1552.61 4211.63,1552.61 U1.4 ; v2(4175,2246.65) 4182.87,2246.65 4190.67,2254.45 4212.32,2254.45 U2.4
  other v1: 4100,1225 4225,1225 4100,1900 4225,1900
  other v2: 4174.31,1501.51 4175,2203.35
M1_+: J1.1 TP1.1 U1.2 | length 325.6
  Top Layer w13: U1.2 4233.32,1513.32 4233.01,1513.01 4374.62,1513.01 4431,1456.63 4464.47,1423.17 TP1.1
M1_-: J1.2 TP3.1 U1.3 | length 327.1
  Top Layer w13: U1.3 4378.01,1533.01 4431,1586 4431,1589.7 4464.47,1623.17 TP3.1
M1_Backward: TP4.1 U1.5 | length 220
  Top Layer w10: TP4.1@4058.17,1716.83 TP4.1 4075,1575 4097.31,1552.69 U1.5
M1_Forward: TP2.1 U1.6 | length 478.2
  Top Layer w10: TP2.1@3969.8,1734.96 3934.84,1700 TP2.1 3900,1550 3916.99,1533.01 U1.6
M2_+: J2.1 TP5.1 U2.2 | length 357.8
  Top Layer w13: U2.2@4216.34,2214.95 4226.39,2214.95 4395.46,2214.95 4432.7,2177.72 4432.7,2132.46 4465.16,2100 TP5.1
M2_-: J2.2 TP7.1 U2.3 | length 312.2
  Top Layer w13: U2.3@4214.74,2234.95 4400.11,2234.95 4465.16,2300 TP7.1
M2_Backward: TP8.1 U2.5 | length 196.1
  Top Layer w10: TP8.1 4050,2275 4070.47,2254.53 U2.5
M2_Forward: TP6.1 U2.6 | length 418.9
  Top Layer w10: TP6.1 3850,2250 3865.16,2234.84 U2.6
S1_OUT: J3.1 Q1.3 R2.1 TP10.1 | length 727.7
  Top Layer w10: Q1.3 4051.22,4063.2 4058.7,4063.2 R2.1 ; R2.1@4051.22,4065.47 4058.7,4065.47 TP10.1@4375,4065.47 ; TP10.1 4683.86,4075 J3.1
S2_OUT: J5.1 Q3.3 R6.1 TP14.1 | length 723.1
  Top Layer w10: Q3.3 4052.76,3841.79 R6.1 4334.98,3845.33 4344.82,3855.18 4525,3855.18 4683.86,3855.18 J5.1
S3_OUT: J7.1 Q5.3 R10.1 TP18.1 | length 748.8
  Top Layer w10: Q5.3 4059.18,3616.05 R10.1 R10.1@4076.11,3632.98 ; R10.1@4062.13,3632.98 R10.1@4076.11,3632.98 ; TP18.1 4697.67,3625 J7.1 ; TP18.1@4384.76,3623.22 4375,3632.98 R10.1@4076.11,3632.98
S4_OUT: J9.1 Q7.3 R14.1 TP22.1 | length 726.8
  Top Layer w10: Q7.3 4053.6,3388.72 R14.1 4375,3386.02 4388.86,3399.88 4524.88,3399.88 4525,3400 4683.86,3400 J9.1
S5_OUT: J4.1 Q2.3 R4.1 TP12.1 | length 723.6
  Top Layer w10: Q2.3 4058.8,3184.74 R4.1 4064.38,3190.32 4525,3190.32 4683.86,3190.32 J4.1
S6_OUT: J6.1 Q4.3 R8.1 TP16.1 | length 723.1
  Top Layer w10: Q4.3 R8.1 4357.48,2964.57 TP16.1 4522.38,2978.54 4681.23,2978.54 J6.1
S7_OUT: J8.1 Q6.3 R12.1 TP20.1 | length 731.7
  Top Layer w10: Q6.3 4045.87,2752.29 R12.1 4341.86,2741.86 4366.27,2766.27 4525,2766.27 4683.86,2766.27 J8.1
Servo1_PWM: Q1.2 R1.1 TP9.1 | length 261.9
  Top Layer w10: TP9.1 3809.25,4050 R1.1 3821.64,4037.61 Q1.2
Servo2_PWM: Q3.2 R5.1 TP13.1 | length 262.1
  Top Layer w10: TP13.1 3809.25,3830.18 R5.1 3823.23,3816.2 Q3.2
Servo3_PWM: Q5.2 R9.1 TP17.1 | length 263.8
  Top Layer w10: TP17.1 3815.08,3607.98 R9.1 3832.6,3590.46 Q5.2
Servo4_PWM: Q7.2 R13.1 TP21.1 | length 258.8
  Top Layer w10: TP21.1 3809.25,3375 R13.1 3821.12,3363.13 Q7.2
Servo5_PWM: Q2.2 R3.1 TP11.1 | length 255.1
  Top Layer w10: TP11.1 3816.78,3165.32 R3.1 3822.96,3159.15 Q2.2
Servo6_PWM: Q4.2 R7.1 TP15.1 | length 262.5
  Top Layer w10: TP15.1 3806.63,2953.54 R7.1 3821.19,2938.98 Q4.2
Servo7_PWM: Q6.2 R11.1 TP19.1 | length 262.5
  Top Layer w10: TP19.1 3804.92,2741.27 R11.1 3819.49,2726.7 Q6.2

## Polygon pours and split planes (outlines as drawn)
5V on Bottom Layer "5V_L02_P173" (solid, pour order 173): 4075,2664.57 4823.03,2664.57 4823.03,4200 4075,4200
12V on Bottom Layer "12V_L02_P172" (solid, pour order 172): 4400,1200 4250,1200 4250,1925 4400,1925
GND on Bottom Layer "GND_L02_P174" (solid, pour order 174): 1000,5000 5000,5000 5000,1000 1000,1000
3.3V on Top Layer "3.3V_L01_P171" (solid, pour order 171): 1000,5002.43 5000,5002.43 5000,1002.43 1000,1002.43
M2_- on Top Layer "M2_-_L01_P168" (solid, pour order 168): 4400,2245 4400,2375 4900,2375 4900,2228 4400,2228
M1_- on Top Layer "M1_-_L01_P162" (solid, pour order 162): 4399.31,1540 4399.31,1525 4849.31,1525 4849.31,1600 4399.31,1600
12V on Top Layer "12V_L01_P164" (solid, pour order 164): 4200,1500 4400,1500 4400,1200 4244.65,1200 4244.65,1473.01 4199.04,1473.01
12V on Top Layer "12V_L01_P165" (solid, pour order 165): 4200,2205 4200,2175 4250,2175 4250,1875 4400,1875 4400,2205
GND on Top Layer "GND_L01_P166" (solid, pour order 166): 4070,1200 4240,1200 4240,1470 4237.85,1472.15 4199.27,1472.15 4199.27,1536.54 4199.31,1536.58 4199.31,1548.17 4231.38,1548.17 4240,1556.79 4240,1570 4150,1570 4150,1470 4070,1470
M1_- on Top Layer "M1_-_L01_P163" (solid, pour order 163): 4849.31,1698.19 4849.31,1600 4399.31,1600 4399.31,1698.14
GND on Top Layer "GND_L01_P167" (solid, pour order 167): 4250,1875 4250,2175 4200,2175 4200,2245 4235.41,2245 4250,2259.59 4250,2275 4150,2275 4150,2175 4075,2175 4075,1875
M1_+ on Top Layer "M1_+_L01_P169" (solid, pour order 169): 4399.25,1525 4849.31,1525 4849.31,1350.69 4850,1350 4400,1350 4400,1500
M2_+ on Top Layer "M2_+_L01_P170" (solid, pour order 170): 4400,2228 4400,2205 4400,2025 4900,2025 4900,2228

## Keep-outs
Keep-Out Layer:
  the board outline again, w50

## Silkscreen, mask and mechanical layers (free items; w line width, h text height)
Top Overlay:
  text "S1_OUT" at 4260,4142.5 h45
  text "S1_IN" at 3360,4042.5 h45
  text "S2_OUT" at 4260,3917.5 h45
  text "S2_IN" at 3360,3817.5 h45
  text "S3_OUT" at 4260,3692.5 h45
  text "S3_IN" at 3360,3592.5 h45
  text "S4_OUT" at 4260,3467.5 h45
  text "S4_IN" at 3360,3367.5 h45
  text "S5_OUT" at 4260,3267.5 h45
  text "S5_IN" at 3360,3167.5 h45
  text "S6_OUT" at 4260,3042.5 h45
  text "S6_IN" at 3360,2942.5 h45
  text "S7_OUT" at 4260,2842.5 h45
  text "S7_IN" at 3360,2742.5 h45
  text "M2_F" at 3695,2450 h60
  text "M2_B" at 3980,2450 h60
  text "-" at 4480,2360.01 h60
  text "+" at 4480,1965 h60
  text "M1_F" at 3760,1770 h60
  text "M1_B" at 4010,1770 h60
  text "-" at 4480,1685.01 h60
  text "+" at 4480,1285 h60